# EAGLE board RMSensor (EAGLE 9.3.0)
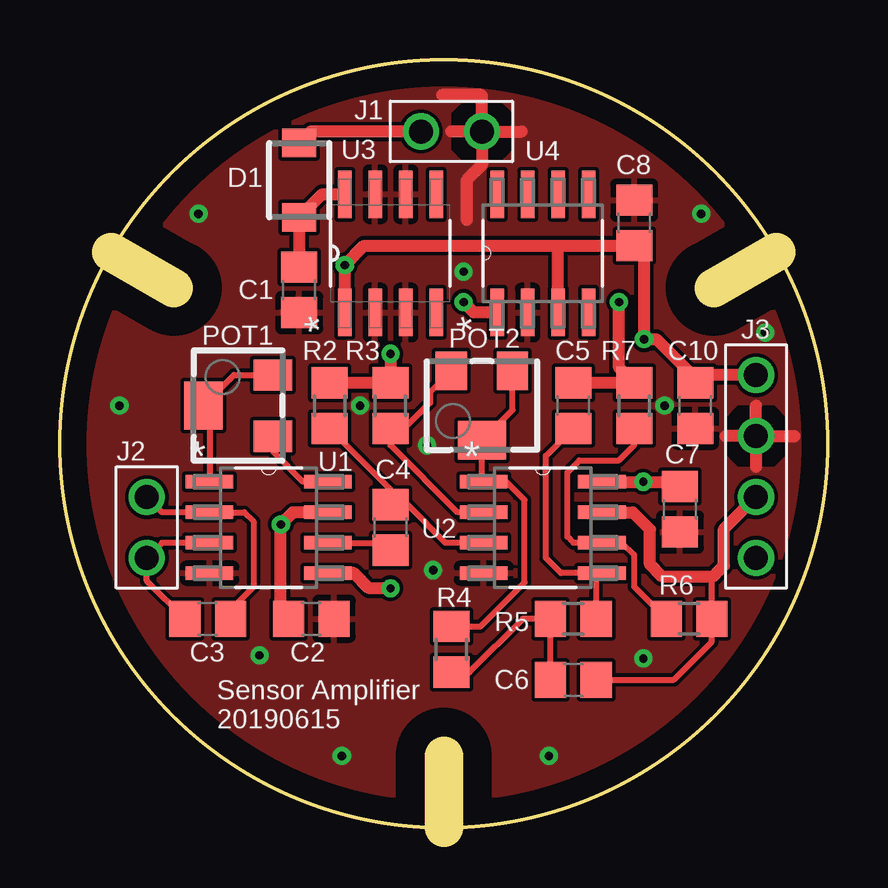
[diagram p0: board, top side]
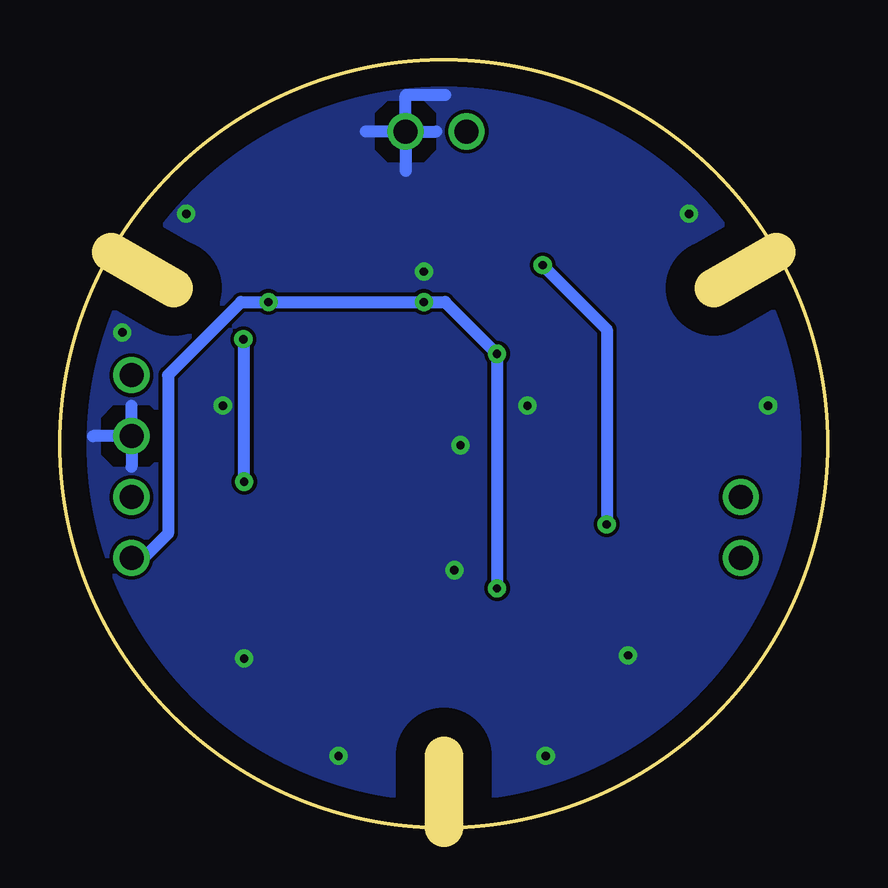
[diagram p1: board, bottom side, seen from below]

Size 32 x 32 mm. Coordinates in mm from the lower left corner, seen from the top.
Outline: circle at 16,16 radius 16
Copper layers (1*16): Top 0.035mm / dielectric 1.5mm / Bottom 0.035mm
Design rules "default": minimum track width 6mil, minimum drill 0.35mm, track to track 6mil, track to pad 6mil, pad to pad 6mil, via to via 6mil, smd to smd 6mil, copper to edge 40mil, drill to drill 6mil, minimum pad ring 10mil, minimum via ring 8mil, stop-mask expansion 4mil, vias tented up to drill 0mil, thermal gap 10mil
tKeepout: 3 lines
bKeepout: 3 lines
tRestrict: 3 lines
bRestrict: 3 lines
Milling: 3 lines

## Footprints (pad centres in the part's own frame; a part is rotated, then mirrored left to right if it is on the bottom)
C0805 = smd 1.3 x 1.5: 1 -0.95,0; 2 0.95,0
SMD_DIODE = smd 1.2 x 1.4: A 1.55,0; C -1.55,0
2_PIN_254 = drill 1: 1 0,0; 2 0,-2.54
4_PIN_254 = drill 1: 1 0,0; 2 0,-2.54; 3 0,-5.08; 4 0,-7.62
RTRIM3214W = smd 1.3 x 1.6: 1 -1.275,-1.45; 3 1.275,-1.45 | smd 2 x 1.6: 2 0,1.45
R0805 = smd 1.3 x 1.5: 1 -0.95,0; 2 0.95,0
SOIC127P600X175-8N = smd 1.981 x 0.559: 1 -2.464,1.905; 2 -2.464,0.635; 3 -2.464,-0.635; 4 -2.464,-1.905; 5 2.464,-1.905; 6 2.464,-0.635; 7 2.464,0.635; 8 2.464,1.905

## Placement (x,y rotation side)
C1  0.33uF, 50V  [C0805]  9.97,22.42 270 top
C2  100nF  [C0805]  10.48,8.7 0 top
C3  DNM  [C0805]  6.16,8.7 180 top
C4  1uF  [C0805]  13.78,12.51 90 top
C5  3.3nF  [C0805]  21.4,17.59 90 top
C6  3.3nF  [C0805]  21.4,6.16 0 top
C7  100nF  [C0805]  25.84,13.27 270 top
C8  100nF  [C0805]  23.94,25.21 90 top
C10  100nF  [C0805]  26.48,17.59 270 top
D1  S1JLR3  [SMD_DIODE]  9.97,26.99 90 top
J1  +24V  [2_PIN_254]  15.05,29.02 90 top
J2  Sensor  [2_PIN_254]  3.62,11.24 180 top
J3  OUT  [4_PIN_254]  29.02,18.86 0 top
POT1  10k  [RTRIM3214W]  7.43,17.59 90 top
POT2  10k  [RTRIM3214W]  17.59,17.59 180 top
R2  82k  [R0805]  11.24,17.59 270 top
R3  1k  [R0805]  13.78,17.59 270 top
R4  24k  [R0805]  16.32,7.43 270 top
R5  24k  [R0805]  21.4,8.7 0 top
R6  33k  [R0805]  26.23,8.7 0 top
R7  56k  [R0805]  23.94,17.59 270 top
U1  INA828ID  [SOIC127P600X175-8N]  8.7,12.51 0 top
U2  OPA2350UA  [SOIC127P600X175-8N]  20.13,12.51 0 top
U3  MC78L05ABDR2G  [SOIC127P600X175-8N]  13.78,23.94 90 top
U4  TLE2425ID  [SOIC127P600X175-8N]  20.13,23.94 90 top

## Library data of the parts
C1 = rcl; OC_FARNELL: 2320844; SPICEPREFIX: C
C2 C7 C8 C10 = rcl; SPICEPREFIX: C
C3 = rcl; DNM: DNM; SPICEPREFIX: C
C4 = rcl; DNM: TBD; SPICEPREFIX: C; TOLERANCE: 1%
C5 C6 = rcl; SPICEPREFIX: C; TOLERANCE: 1%
D1 = DD_general; MPN: S1JL R3; OC_FARNELL: 1559153
J1 J2 = DD_general; DNM: TBD; MPN: PRPC002DAAN-RC
J3 = DD_general; MPN: PRPC004SAAN-RC
POT1 POT2 = rcl; MPN: 3214W-1-103E; OC_FARNELL: 988273; SPICEMODEL: X; SPICEPREFIXL: POT
R2 = rcl; DNM: TBD; SPICEPREFIX: R; TOLERANCE: 1%
R3 = rcl; SPICEPREFIX: R
R4-R7 = rcl; SPICEPREFIX: R; TOLERANCE: 1%
U1 = DD_general; MPN: INA828ID; OC_FARNELL: 2802937; OC_NEWARK: -; PACKAGE: SOIC-8; SUPPLIER: Texas Instruments
U2 = Texas Instruments_By_element14_Batch_1; MPN: OPA2350UA; OC_FARNELL: 1101542; OC_NEWARK: 35C1873; PACKAGE: SOIC-8; SUPPLIER: Texas Instruments
U3 = ON Semiconductor_By_element14_Batch_1; MPN: MC78L05ABDR2G; OC_FARNELL: 1353941; OC_NEWARK: 88H4745; PACKAGE: 8-SOIC; SUPPLIER: ON Semi
U4 = DD_general; MPN: TLE2425ID; OC_FARNELL: 1234831; OC_NEWARK: -; PACKAGE: SOIC-8; SUPPLIER: Texas Instruments

## Nets
+2.5V: C5.2 J3.4 R2.1 R3.1 R7.1 U1.5 U4.1
+5V: C2.1 C7.1 C8.1 C10.1 J3.1 U1.7 U2.8 U3.1 U4.3
+24V: D1.A J1.1
+IN_A: C4.2 R2.2 U2.3
+IN_B: C5.1 R5.2 U2.5
-IN_A: POT2.3 R3.2 U2.2
-IN_B: R6.1 R7.2 U2.6
GND: C1.2 C2.2 C7.2 C8.2 C10.2 J1.2 J3.2 U1.4 U2.4 U3.2 U3.3 U3.6 U3.7 U4.2
N$2: C1.1 D1.C U3.8
N$3: POT1.1 U1.8
N$4: C4.1 U1.6
N$5: POT1.2 POT1.3 U1.1
N$6: C3.2 J2.1 U1.3
N$7: C3.1 J2.2 U1.2
N$11: C6.1 R4.2 R5.1
OUT_A: POT2.1 POT2.2 R4.1 U2.1
OUT_B: C6.2 J3.3 R6.2 U2.7

## Tracks (layer width: path | path; a pad name or v marks a point on that pad's centre or on a via)
+2.5V  (via drill 0.35)
  Top 0.508: R2.1 R3.1 v13.78,19.75 | U4.1 17.26,21.48 v16.83,21.91 | v13.78,9.97 12.89,9.97 12.26,10.61 U1.5 | C5.2 R7.1 23.3,19.18 v23.3,21.91
  Bottom 0.508: J3.4 28.51,11.24 27.5,12.26 27.5,18.86 24.45,21.91 v23.3,21.91 v16.83,21.91 15.94,21.91 v13.78,19.75 v13.78,9.97
+5V  (via drill 0.35)
  Top 0.508: 20.77,24.26 12.69,24.26 v11.88,23.45 U3.1 | 20.77,24.26 C8.1 24.35,23.85 v24.35,20.36 24.86,20.36 26.48,18.74 C10.1 26.8,18.86 J3.1 | U4.3 20.77,24.26 | U2.8 v24.32,14.41 25.65,14.41 C7.1 | C2.1 9.21,9.02 v9.21,12.64 9.72,13.14 U1.7
  Bottom 0.508: v11.88,23.45 11.88,23.43 9.21,20.77 v9.21,12.64 | v24.32,14.41 24.32,20.33 v24.35,20.36
+24V
  Top 0.508: J1.1 10.45,29.02 D1.A
+IN_A
  Top 0.254: R2.2 13.78,14.1 C4.2 14.48,13.46 16.07,11.88 U2.3
+IN_B
  Top 0.254: R5.2 22.35,10.36 U2.5 20.89,10.61 20.26,11.24 20.26,15.5 C5.1
-IN_A
  Top 0.254: U2.2 16.57,13.14 13.78,15.94 R3.2 14.35,16.64 15.43,17.72 15.43,18.16 POT2.3
-IN_B
  Top 0.254: R7.2 23.94,15.94 23.3,15.3 21.65,15.3 21.15,14.8 21.15,12.13 21.4,11.88 U2.6 23.43,11.88 23.94,11.37 23.94,10.04 R6.1
GND  (via drill 0.35)
  Top 0.508: J1.2 19.24,29.02 | J1.2 17.59,30.51 17.56,30.54 15.94,30.54 | J1.2 16.32,29.02 | J1.2 17.59,27.62 16.95,26.99 16.95,25.34 | J3.2 30.63,16.32 | J3.2 29.02,17.59 | J3.2 29.02,15.05 | J3.2 27.75,16.32
  Bottom 0.508: J1.2 19.24,29.02 | J1.2 17.59,27.37 | J1.2 17.59,30.51 17.56,30.54 15.94,30.54 | J1.2 16.32,29.02 | J3.2 30.63,16.32 | J3.2 29.02,17.59 | J3.2 29.02,15.05
  other vias: 5.78,25.59 26.73,25.59 16.83,23.18 2.48,17.59 15.3,15.94 15.56,10.73 8.32,7.18 11.75,2.99 20.38,2.99 24.32,7.05 25.21,17.59 12.51,17.59 29.4,20.64
  pour Top: 16,0.5 arc-90 0.5,16 arc-90 16,31.5 arc-90 31.5,16 arc-90
  pour Bottom: 16,0.5 arc-90 0.5,16 arc-90 16,31.5 arc-90 31.5,16 arc-90
GND1
  cutout Top: 16.32,28.26 16.32,29.78 16.83,30.29 18.35,30.29 18.86,29.78 18.86,28.26 18.35,27.75 16.83,27.75
  cutout Bottom: 16.32,28.26 16.32,29.78 16.83,30.29 18.35,30.29 18.86,29.78 18.86,28.26 18.35,27.75 16.83,27.75
GND2
  cutout Top: 27.75,16.32 27.75,17.08 28.26,17.59 29.02,17.59 29.78,17.59 30.29,17.08 30.29,16.32 30.29,15.56 29.78,15.05 28.26,15.05 27.75,15.56
GND3
  cutout Bottom: 27.75,15.56 27.75,17.08 28.26,17.59 29.78,17.59 30.29,17.08 30.29,15.56 29.78,15.05 28.26,15.05
N$2
  Top 0.508: C1.1 D1.C 10.94,26.4 U3.8
N$3
  Top 0.254: U1.8 10.14,14.41 8.88,15.68 POT1.1
N$4
  Top 0.254: U1.6 13.46,11.88 C4.1
N$5
  Top 0.254: POT1.3 7.26,18.86 POT1.2 6.24,17.33 U1.1
N$6
  Top 0.254: U1.3 4.26,11.88 J2.1 3.62,10.29 C3.2
N$7
  Top 0.254: J2.2 4.26,13.14 U1.2 7.68,13.14 8.06,12.76 8.06,10.04 7.11,9.08 C3.1
N$11
  Top 0.254: R4.2 17.08,6.48 19.3,8.7 R5.1 C6.1
OUT_A
  Top 0.254: POT2.1 18.86,17.41 POT2.2 17.59,14.49 U2.1 18.61,14.41 19.37,13.65 19.37,10.22 17.52,8.38 R4.1
OUT_B
  Top 0.254: C6.2 25.59,6.16 27.18,7.74 R6.2 27.18,10.41 27.5,10.73
  Top 0.508: J3.3 27.68,12.44 27.68,10.92 27.5,10.73 27.24,10.48 25.08,10.48 24.6,10.96 24.6,12.42 23.88,13.14 U2.7

## Text on the board
tNames: Sensor Amplifier / 20190615